# Altium PCB PCB1.PcbDoc
Units mm, origin at the board's own origin, x right, y up, seen from the top; angles counter-clockwise.
Board outline 29 x 39.5 mm, 2 copper layers (Top Layer, Bottom Layer), stack 1.57 mm thick; 32 components, 19 nets, 75 pads, 145 vias.
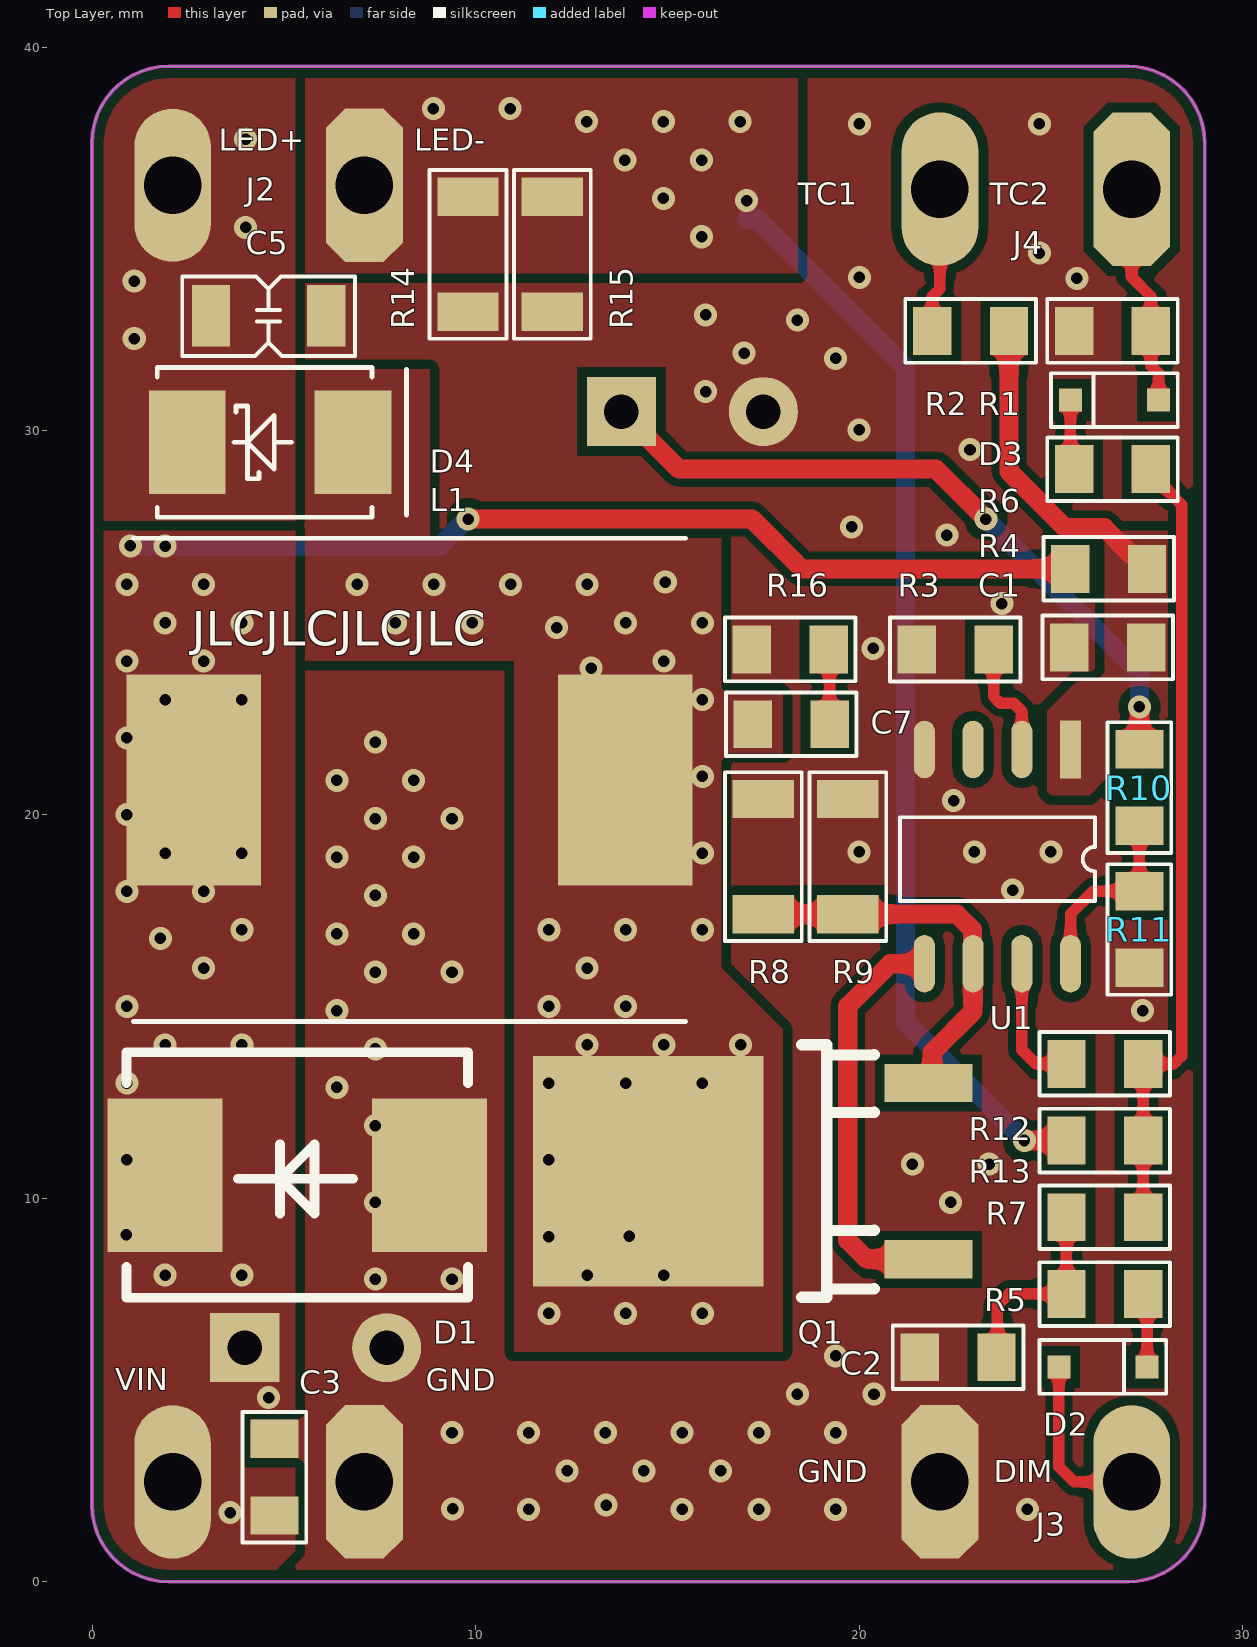
[diagram p0: Top Layer view]
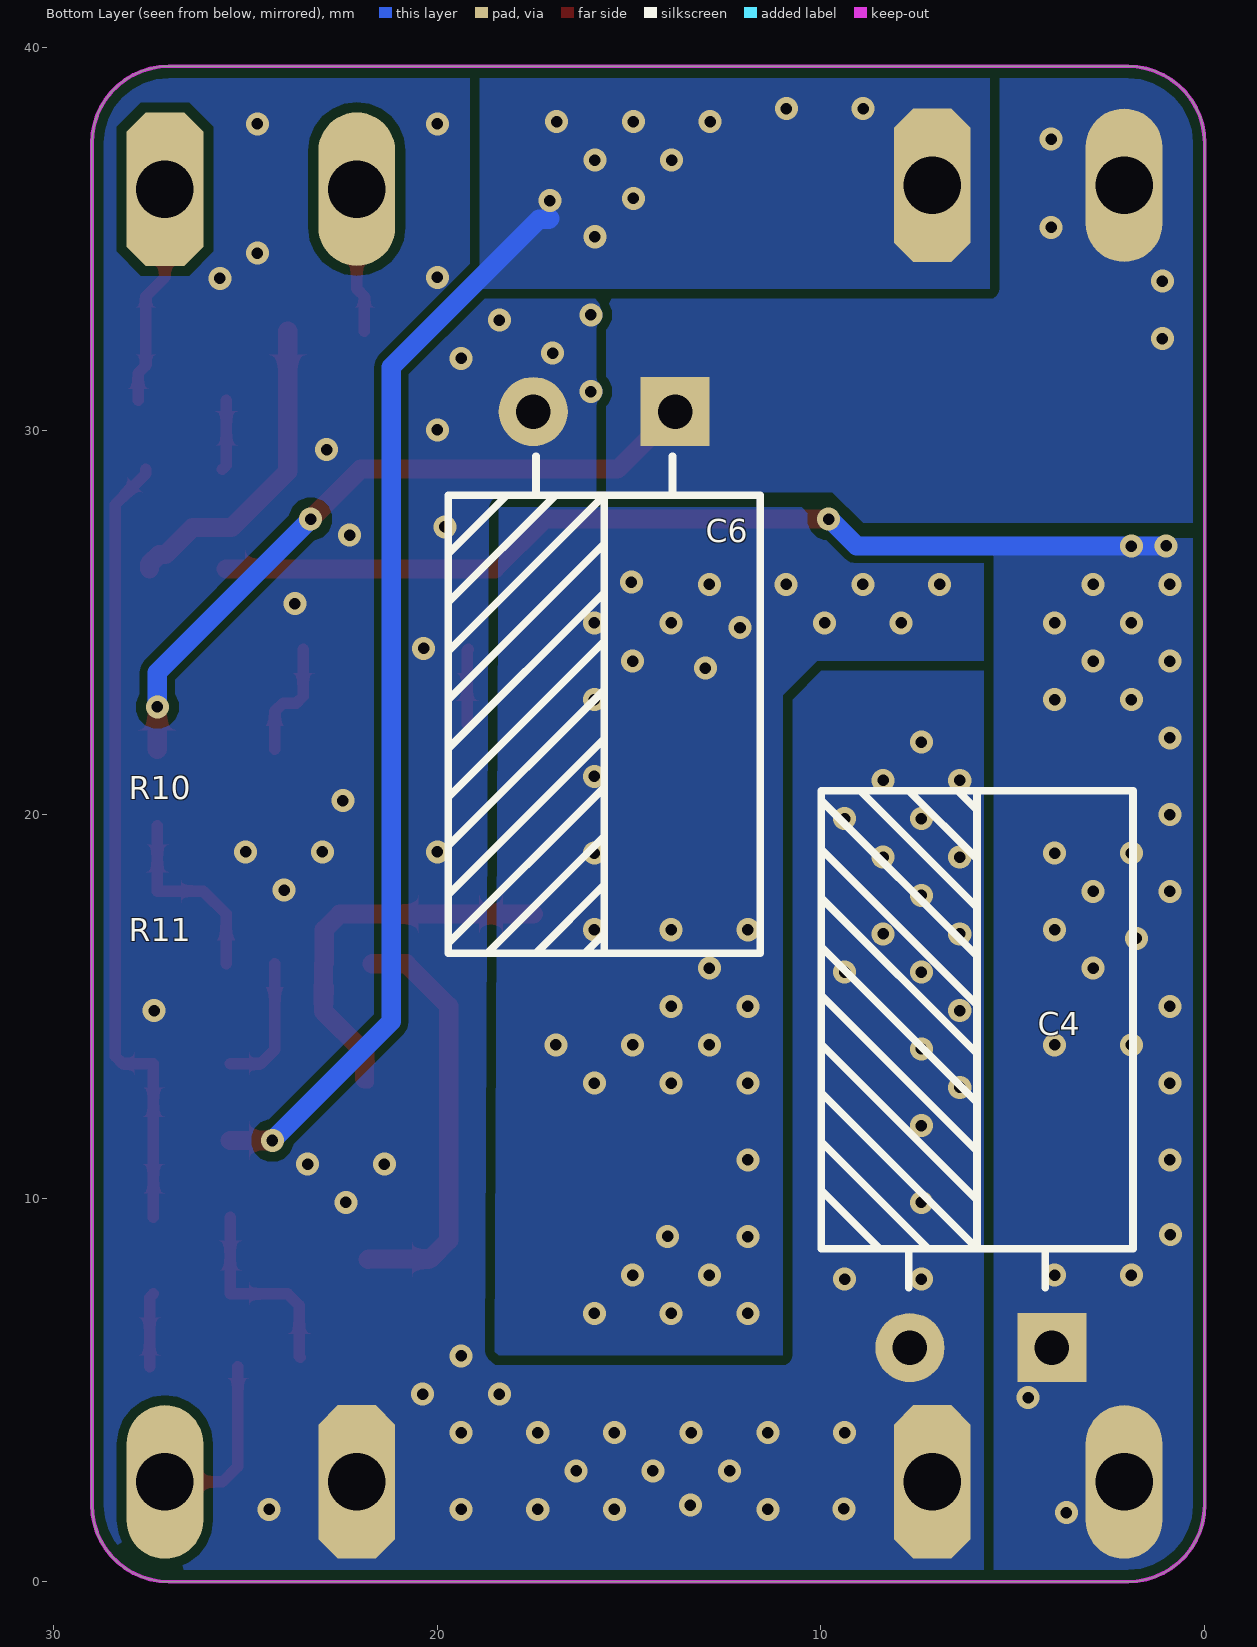
[diagram p1: Bottom Layer view, seen from below]
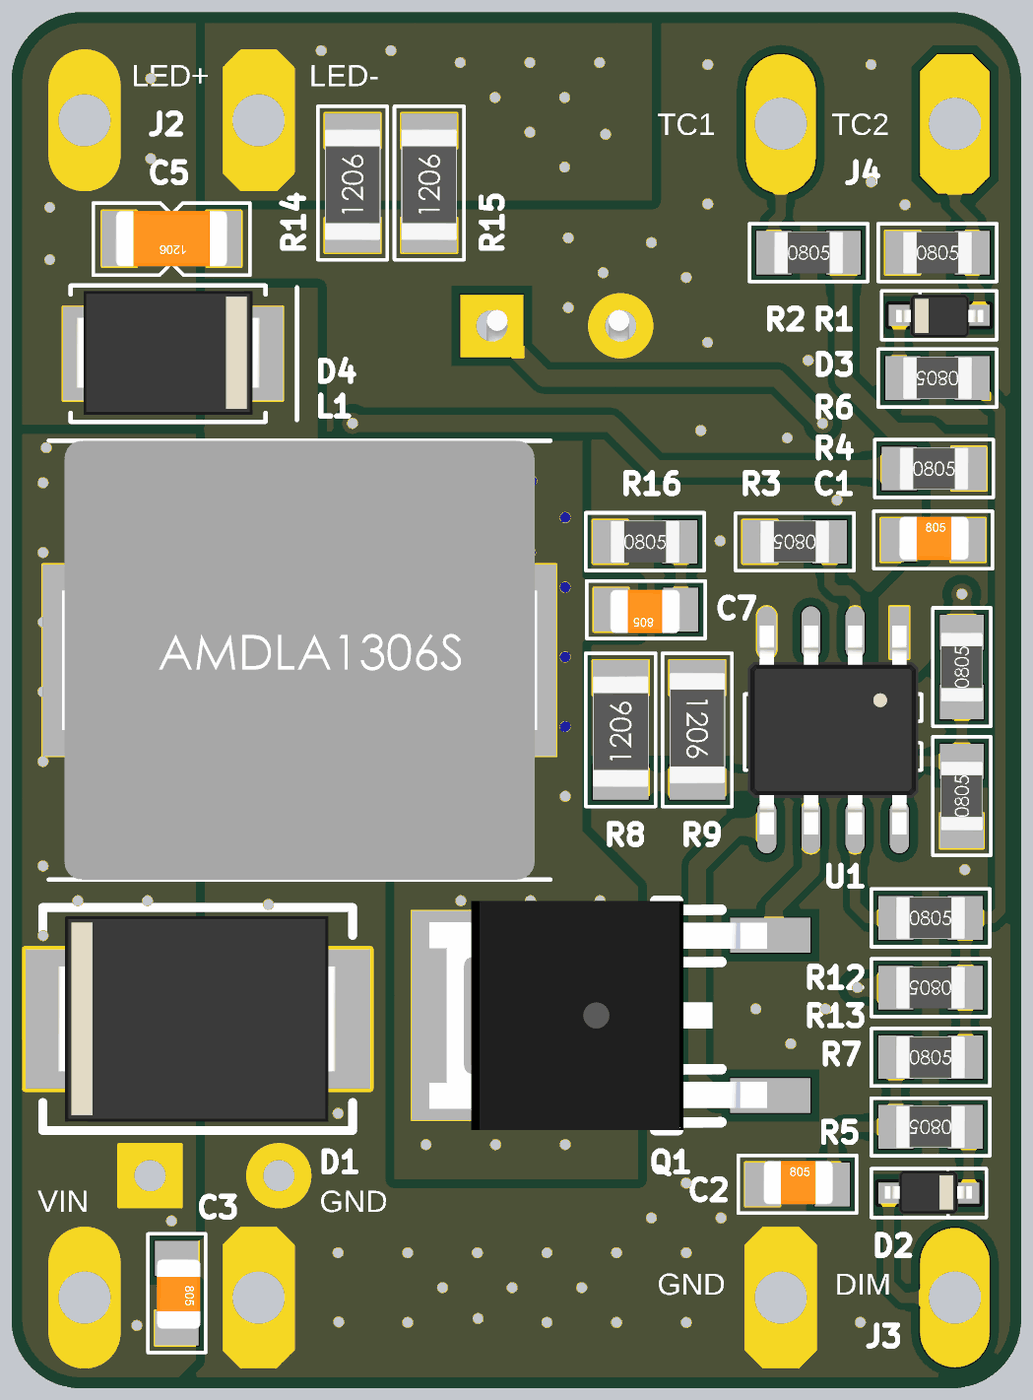
[diagram p2: 3D render of the assembled board from above, using the file's embedded part models]

## Layer stack, top to bottom
Top Solder: solder mask 0.01, Solder Resist, Dk 3.5
Top Layer: signal copper 0.035
Dielectric 1: dielectric 1.5, FR-4, Dk 4.6
Bottom Layer: signal copper 0.035
Bottom Solder: solder mask 0.01, Solder Resist, Dk 3.5

## Board outline
-0.002,2 -0.002,37.5 cw(c2,37.5) 2,39.502 27,39.502 cw(c27,37.5) 29.002,37.5 29.002,2 cw(c27,2) 27,-0.002 2,-0.002 cw(c2,2)

## Design rules (kind name [scope] priority, off if disabled: settings)
Clearance Clearance_1 [OnMid vs OnMid] p1: gap=0.254 ignorepadtopadclearanceinfootprint=FALSE except(0.127: Arc-Arc Arc-Track Arc-Text Track-Track Track-Text SMDPad-SMDPad Text-Text; 0.2: Arc-SMDPad Arc-Fill Arc-Poly Arc-Region Track-SMDPad Track-Fill Track-Poly Track-Region SMDPad-Text Fill-Text Poly-Text Region-Text; 0.33: Arc-THPad Arc-Hole Track-THPad Track-Hole THPad-Text Text-Hole; 0.5: THPad-THPad THPad-Hole) sourcerule=56 cellrowname=All cellrowtype=0 cellcolname=All cellcoltype=0 innerlayers=TRUE
Clearance Clearance_2 [(ExistsOnLayer('Top Layer') Or ExistsOnLayer('Bottom Layer')) vs (ExistsOnLayer('Top Layer') Or ExistsOnLayer('Bottom Layer'))] p2: gap=0.254 ignorepadtopadclearanceinfootprint=FALSE except(0.127: Arc-Arc Arc-Track Arc-Text Track-Track Track-Text SMDPad-SMDPad Text-Text; 0.2: Arc-SMDPad Arc-Fill Arc-Poly Arc-Region Track-SMDPad Track-Fill Track-Poly Track-Region SMDPad-Text Fill-Text Poly-Text Region-Text; 0.33: Arc-THPad Arc-Hole Track-THPad Track-Hole THPad-Text Text-Hole; 0.5: THPad-THPad THPad-Hole) sourcerule=56 cellrowname=All cellrowtype=0 cellcolname=All cellcoltype=0 outerlayers=TRUE
Clearance [All] p3: gap=0.254 ignorepadtopadclearanceinfootprint=FALSE ismatrix=TRUE
HoleSize [All] p1: absolutevalues=TRUE maxlimit=6 minlimit=0.2 maxpercent=80.000 minpercent=20.000
HoleToHoleClearance [All] p1: gap=0.5 allowstackedmicrovias=TRUE
MinimumSolderMaskSliver [All] p1: minsoldermaskwidth=0.1
PolygonConnect [All] p1: connectstyle=Direct reliefconductorwidth=0.254 reliefentries=4 polygonreliefangle="90 Angle" airgapwidth=0.254
RoutingVias RoutingViaStyle_1 [InNet('VIN')] p1: holewidth=0.3 width=0.6 viastyle="Through Hole" minholewidth=0.3 minwidth=0.6 maxholewidth=0.3 maxwidth=0.6
RoutingVias RoutingViaStyle_2 [InNet('VCC')] p2: holewidth=0.3 width=0.6 viastyle="Through Hole" minholewidth=0.3 minwidth=0.6 maxholewidth=0.3 maxwidth=0.6
RoutingVias RoutingViaStyle_3 [InNet('TOFF')] p3: holewidth=0.3 width=0.6 viastyle="Through Hole" minholewidth=0.3 minwidth=0.6 maxholewidth=0.3 maxwidth=0.6
RoutingVias RoutingViaStyle_4 [InNet('CS')] p4: holewidth=0.3 width=0.6 viastyle="Through Hole" minholewidth=0.3 minwidth=0.6 maxholewidth=0.3 maxwidth=0.6
RoutingVias RoutingViaStyle_5 [InNet('DIM')] p5: holewidth=0.3 width=0.6 viastyle="Through Hole" minholewidth=0.3 minwidth=0.6 maxholewidth=0.3 maxwidth=0.6
RoutingVias RoutingViaStyle_6 [InNet('GND')] p6: holewidth=0.3 width=0.6 viastyle="Through Hole" minholewidth=0.3 minwidth=0.6 maxholewidth=0.3 maxwidth=0.6
RoutingVias RoutingViaStyle_7 [InNet('FB')] p7: holewidth=0.3 width=0.6 viastyle="Through Hole" minholewidth=0.3 minwidth=0.6 maxholewidth=0.3 maxwidth=0.6
RoutingVias RoutingViaStyle_8 [InNet('GATE')] p8: holewidth=0.3 width=0.6 viastyle="Through Hole" minholewidth=0.3 minwidth=0.6 maxholewidth=0.3 maxwidth=0.6
RoutingVias RoutingViaStyle_9 [InNet('IND_LED')] p9: holewidth=0.3 width=0.6 viastyle="Through Hole" minholewidth=0.3 minwidth=0.6 maxholewidth=0.3 maxwidth=0.6
RoutingVias RoutingViaStyle_10 [InNet('LED-')] p10: holewidth=0.3 width=0.6 viastyle="Through Hole" minholewidth=0.3 minwidth=0.6 maxholewidth=0.3 maxwidth=0.6
RoutingVias RoutingViaStyle_11 [InNet('LED+')] p11: holewidth=0.3 width=0.6 viastyle="Through Hole" minholewidth=0.3 minwidth=0.6 maxholewidth=0.3 maxwidth=0.6
RoutingVias RoutingViaStyle_12 [InNet('NetC2_2')] p12: holewidth=0.3 width=0.6 viastyle="Through Hole" minholewidth=0.3 minwidth=0.6 maxholewidth=0.3 maxwidth=0.6
RoutingVias RoutingViaStyle_13 [InNet('NetC7_1')] p13: holewidth=0.3 width=0.6 viastyle="Through Hole" minholewidth=0.3 minwidth=0.6 maxholewidth=0.3 maxwidth=0.6
RoutingVias RoutingViaStyle_14 [InNet('NetD2_2')] p14: holewidth=0.3 width=0.6 viastyle="Through Hole" minholewidth=0.3 minwidth=0.6 maxholewidth=0.3 maxwidth=0.6
RoutingVias RoutingViaStyle_15 [InNet('NetD3_2')] p15: holewidth=0.3 width=0.6 viastyle="Through Hole" minholewidth=0.3 minwidth=0.6 maxholewidth=0.3 maxwidth=0.6
RoutingVias RoutingViaStyle_16 [InNet('NetR6_1')] p16: holewidth=0.3 width=0.6 viastyle="Through Hole" minholewidth=0.3 minwidth=0.6 maxholewidth=0.3 maxwidth=0.6
RoutingVias RoutingViaStyle_17 [InNet('OVP')] p17: holewidth=0.3 width=0.6 viastyle="Through Hole" minholewidth=0.3 minwidth=0.6 maxholewidth=0.3 maxwidth=0.6
RoutingVias RoutingViaStyle_18 [InNet('TC1')] p18: holewidth=0.3 width=0.6 viastyle="Through Hole" minholewidth=0.3 minwidth=0.6 maxholewidth=0.3 maxwidth=0.6
RoutingVias RoutingViaStyle_19 [InNet('TC2')] p19: holewidth=0.3 width=0.6 viastyle="Through Hole" minholewidth=0.3 minwidth=0.6 maxholewidth=0.3 maxwidth=0.6
RoutingVias RoutingViaStyle_20 [InDifferentialPairClass('All Differential Pairs')] p20: holewidth=0.3 width=0.6 viastyle="Through Hole" minholewidth=0.3 minwidth=0.6 maxholewidth=0.3 maxwidth=0.6
RoutingVias RoutingViaStyle_21 [All] p21: holewidth=0.254 width=0.254 viastyle="Through Hole" minholewidth=0.254 minwidth=0.254 maxholewidth=0.254 maxwidth=0.254
SilkToSilkClearance [All] p1: silktosilkclearance=0.2
SilkToSolderMaskClearance [IsPad] p1: minsilkscreentomaskgap=0.15 clearancetoexposedcopper=TRUE
SolderMaskExpansion [All] p1: expansion=0.038 istentingtop=FALSE
Width [All] p1: maxlimit=0.5 minlimit=0.127 preferedwidth=0.3 minimp=50.000000 maximp=50.000000 favimp=50.000000
25 further rules are at their usual default settings.

## Components (designator, comment, footprint, x,y, rotation, side; value= is the part's Value field where it differs from the comment)
C1 "CAP SMD 0805 10uF 50V" "CAP Ceramic SMD 0805" 26.5,24.3 r0 top value=10uF
C2 "CAP SMD 0805 10uF 50V" "CAP Ceramic SMD 0805" 22.6,5.8 r0 top value=10uF
C3 "CAP SMD 0805 10uF 50V" "CAP Ceramic SMD 0805" 4.7,2.7 r270 top value=10uF
C5 "CAP SMD 1206 1uF 100V" "CAP Ceramic SMD 1206" 4.6,33 r180 top value=1uF
C6 "180uF" "CAP Electrolytic TH D8C3.5H11.5 (H)" 13.8,30.5 r270 bottom
C7 "CAP SMD 0805 1nF" "CAP Ceramic SMD 0805" 18.2,22.4 r180 top value=1nF
D1 "S5BC" SMC 1.9,10.6 r0 top
D2 "DIODE SMD BAT54WB" SOD-323 25.2,5.6 r0 top
D3 "DIODE SMD BAT54WB" SOD-323 27.8,30.8 r180 top
D4 "SS10100L" DO-214AA 6.8,29.7 r180 top
J2 "ScrewTerminal 2P mm" "Connector screw terminal Block TH 1x2 9.5 WJ46-B" 7.1,36.4 r180 top
J3 "ScrewTerminal 2P mm" "Connector screw terminal Block TH 1x2 9.5 WJ46-B" 22.1,2.6 r0 top
J4 "ScrewTerminal 2P mm" "Connector screw terminal Block TH 1x2 9.5 WJ46-B" 27.1,36.3 r180 top
L1 "IND SMD 1365 10uH" "IND SMD 1365" 2.65,20.9 r0 top value=10uH
Q1 "FQD13N06L" TO252_2 16.2,10.7 r180 top
R1 "1K" "RES SMD 0805" 26.6,32.6 r0 top
R2 "10K" "RES SMD 0805" 22.9,32.6 r0 top
R3 "75K" "RES SMD 0805" 22.5,24.3 r180 top
R4 "5.1K" "RES SMD 0805" 26.5,26.4 r0 top
R5 "30K" "RES SMD 0805" 26.4,7.5 r180 top
R6 "1K" "RES SMD 0805" 26.6,29 r180 top
R7 "30K" "RES SMD 0805" 26.4,9.5 r0 top
R8 "16mR" "RES SMD 1206" 17.5,18.9 r90 top value=160mR
R9 "16mR" "RES SMD 1206" 19.7,18.9 r270 top value=160mR
R10 "430K" "RES SMD 0805" 27.3,20.7 r90 top
R11 "10K" "RES SMD 0805" 27.3,17 r90 top
R12 "1K" "RES SMD 0805" 26.4,13.5 r0 top
R13 "1K" "RES SMD 0805" 26.4,11.5 r180 top
R14 "1R2" "RES SMD 1206" 9.8,34.6 r90 top
R15 "1R2" "RES SMD 1206" 12,34.6 r90 top
R16 "2K2" "RES SMD 0805" 18.2,24.3 r0 top
U1 "SN3948" SN3948_SOP8 23.6,18.9 r270 top

## Footprints (in the part's own frame and the unit in brackets; to place one, negate y for a bottom-side part, rotate by r counter-clockwise, add the part's x,y. Pads: shape width x height; smd on the part's side, far side on the other; paste and mask are expansions set on the pad)
"CAP Ceramic SMD 0805" [mm]
  rect 1x1.25 smd: 1(-1.025,0.05) 2(0.975,0.05)
  silkscreen extent -1.73,-0.78 1.68,0.88, body extent -1,-0.52 1,0.73, height 0.78
"CAP Ceramic SMD 1206" [mm]
  rect 1x1.6 smd: 1(-1.5,0) 2(1.5,0)
  silkscreen extent -2.25,-1.02 2.25,1.05, body extent -1.6,-0.8 1.6,0.8, height 1
"CAP Electrolytic TH D8C3.5H11.5 (H)" [mm]
  rect 1.8x1.8 hole 0.9: 1(0,0)
  round 1.8 hole 0.9: 2(0,-3.7)
  silkscreen extent 1.16,-5.91 14.12,2.21, body extent -0.46,-5.9 13.26,2.1, height 8.03
"Connector screw terminal Block TH 1x2 9.5 WJ46-B" [mm]
  oct 2x4 hole 1.5: 1(0,0)
  oval 2x4 hole 1.5: 2(5,0)
DO-214AA [mm]
  rect 2x2.7 smd: 1(0,0) 2(4.32,0)
  silkscreen extent -1.4,-1.95 5.1,1.95, body extent -0.35,-1.8 4.95,1.75, height 2.15
"IND SMD 1365" [mm]
  rect 3.5x5.5 smd: 1(0,0) 2(11.25,0)
  silkscreen extent -1.58,-6.3 12.83,6.3, body extent -1.19,-6.3 12.44,6.3, height 6.2
"RES SMD 0805" [mm]
  rect 1x1.25 smd: 1(-1,0) 2(1,0)
  silkscreen extent -1.7,-0.83 1.7,0.83, body extent -1,-0.6 1,0.6, height 0.48
"RES SMD 1206" [mm]
  rect 1x1.6 smd: 1(-1.5,0) 2(1.5,0)
  silkscreen extent -2.2,-1 2.2,1, body extent -1.65,-0.8 1.55,0.8, height 0.47
SMC [mm]
  rect 3x4 smd mask+0.102: 1(6.9,0) 2(0,0)
  silkscreen extent -1,-3.2 7.9,3.2, body extent -0.58,-2.95 7.42,2.95, height 2.31
SN3948_SOP8 [mm]
  rect 1.5x0.55 smd: 1(-2.792,1.905)
  oval 1.5x0.55 smd: 2(-2.792,0.635) 3(-2.792,-0.635) 4(-2.792,-1.905) 5(2.793,-1.905) 6(2.793,-0.635) 7(2.793,0.635) 8(2.793,1.905)
  silkscreen extent -1.03,-2.54 1.15,2.54, body extent -3,-2.45 3,2.45, height 1.85
SOD-323 [mm]
  rect 0.6x0.6 smd mask+0.102: 1(0,0) 2(2.3,0)
  silkscreen extent -0.5,-0.7 2.8,0.7, body extent -0.11,-0.61 2.39,0.64, height 1.1
TO252_2 [mm]
  rect 2.3x1 smd: 1(-5.6,2.3) 3(-5.6,-2.3)
  rect 6x6 smd: 2(1.7,0)
  silkscreen extent -4.19,-3.29 -2.29,3.29, body extent -5.5,-3.29 4.2,3.29, height 2.3

## Part data
C1 C2 C3: "50V 10uF X5R ±10% 0805 Multilayer Ceramic Capacitors MLCC - SMD/SMT ROHS", Manufacturer="Murata Electronics", Manufacturer Part Number=GRM21BR61H106KE43L, Supplier Part Number=C440198, Supplier=LCSC
C5: "100V 1uF X7R ±10% 1206 Multilayer Ceramic Capacitors MLCC - SMD/SMT ROHS", Manufacturer=YAGEO, Manufacturer Part Number=CC1206KKX7R0BB105, Supplier Part Number=C70463, Supplier=LCSC
C6: library part "CAP POL 180uF 50V", Manufacturer="SamYoung Electronics", Manufacturer Part Number="NXA50V180M8*20 LO", Supplier Part Number=C2835640, Supplier=LCSC
C7: "100V 1nF NP0 ±5% 0805 Multilayer Ceramic Capacitors MLCC - SMD/SMT ROHS", Manufacturer=YAGEO, Manufacturer Part Number=CC0805JRNPO0BN102, Supplier Part Number=C326940, Supplier=LCSC
D1: "5A 100V 1.15V@5A SMC(DO-214AB) Diodes - General Purpose ROHS", Manufacturer="Diodes Incorporated", Manufacturer Part Number=S5BC-13-F, Supplier Part Number=C155211, Supplier=LCSC
D2 D3: "30V 100mA 240mV@100mA SOD-323W Schottky Diodes ROHS", Manufacturer="Shandong Jingdao Microelectronics", Manufacturer Part Number=BAT54WB, Supplier Part Number=C2972951, Supplier=LCSC
D4: "100V 10A 700mV SMB Schottky Diodes ROHS", Manufacturer=GOODWORK, Supplier Part Number=C21713964, Manufacturer Part Number=SS10100L, Supplier=LCSC
J2 J3 J4: "Copper Alloy 1x2P Tin 5mm 2.5 1 2 10A -40℃~+105℃ 300V Green 14~26 Direct Insert Plugin,P=5mm Screw Terminal Blocks ROHS", Manufacturer=MAX, Manufacturer Part Number=MX126-5.0-02P-GN01-Cu-S-A, Supplier Part Number=C5188434, ComponentLink1Description=https://datasheet.ciiva.com/824/6912141100xx-824001.pdf?src-supplier=Digi-Key, ComponentLink1URL=https://datasheet.ciiva.com/824/6912141100xx-824001.pdf?src-supplier=Digi-Key, ComponentLink2Description=https://datasheet.ciiva.com/48693/001088618-da-01-en-wr-tbl-terminal-block2141-691214110002-48693195.pdf?src-supplier=Conrad, ComponentLink2URL=https://datasheet.ciiva.com/48693/001088618-da-01-en-wr-tbl-terminal-block2141-691214110002-48693195.pdf?src-supplier=Conrad, Supplier=LCSC
L1: "10A 10uH ±20% 13A 19.2mΩ SMD,12.6x13.5mm Inductors (SMD) ROHS", Manufacturer=KOHERelec, Manufacturer Part Number=MDA1365-100M, Supllier Part Number=C2847583, Supplier=LCSC
Q1: "60V 11A 115mΩ@10V,5.5A 2.5V@250uA 1 N-Channel TO-252AA MOSFETs ROHS", Manufacturer=onsemi, Manufacturer Part Number=FQD13N06LTM, Supplier Part Number=C236914, Supplier=LCSC
R1 R6 R12 R13: library part "RES SMD 0805 1K", Manufacturer=YAGEO, Manufacturer Part Number=RC0805FR-071KL, Supplier Part Number=C95781, Supplier=LCSC
R2 R11: library part "RES SMD 0805 10K", "125mW Thick Film Resistors 150V ±100ppm/℃ ±1% 10kΩ 0805 Chip Resistor - Surface Mount ROHS", Manufacturer=YAGEO, Manufacturer Part Number=RC0805FR-0710KL, Supplier Part Number=C84376, Supplier=LCSC
R3: library part "RES SMD 0805 75K", "125mW Thick Film Resistors 150V ±100ppm/℃ ±1% 75kΩ 0805 Chip Resistor - Surface Mount ROHS", Manufacturer=YAGEO, Manufacturer Part Number=RC0805FR-0775KL, Supplier Part Number=C137491, Supplier=LCSC
R4: library part "RES SMD 0805 5.1K", "400mW Thick Film Resistors 150V ±200ppm/℃ ±5% 5.1kΩ 0805 Chip Resistor - Surface Mount ROHS", Manufacturer="ROHM Semicon", Manufacturer Part Number=ESR10EZPJ512, Supplier Part Number=C2085709, Supplier=LCSC
R5 R7: library part "RES SMD 0805 30K", Manufacturer=FOJAN, Manufacturer Part Number=FRC0805J303TS, Supplier Part Number=C2930272, Supplier=LCSC
R8 R9: library part "RES SMD 1206 160mR", "500mW Thick Film Resistors 200V ±1% 160mΩ 1206 Chip Resistor - Surface Mount ROHS", Manufacturer="UNI-ROYAL(Uniroyal Elec)", Manufacturer Part Number=HP06W2F160LT5E, Supplier Part Number=C414953, Supplier=LCSC
R10: library part "RES SMD 0805 430K", "125mW Thick Film Resistors 150V ±100ppm/℃ ±5% 430kΩ 0805 Chip Resistor - Surface Mount ROHS", Manufacturer=YAGEO, Manufacturer Part Number=RC0805JR-07430KL, Supplier Part Number=C137431, Supplier=LCSC
R14 R15: library part "RES SMD 1206 1R20", "500mW Thick Film Resistors ±200ppm/℃ ±1% 1.2Ω 1206 Chip Resistor - Surface Mount ROHS", Manufacturer=YAGEO, Manufacturer Part Number=RC1206FR-7W1R2L, Supplier Part Number=C5355180, Supplier=LCSC
R16: library part "RES SMD 0805 2K2", Manufacturer=YAGEO, Manufacturer Part Number=RC0805FR-072K2L, Supplier Part Number=C114561, Supplier=LCSC
U1: "SOP-8 DC-DC Converters ROHS", Manufacturer=ISSI, Supplier Part Number=C3041112, Manufacturer Part Number=SN3948, Supplier=LCSC

## Free pads (board coordinates)
  rect 1.8x1.8 hole 0.9: 1(3.981,6.1)
  oct 2x4 hole 1.5: 1(7.1,2.6)
  oval 2x4 hole 1.5: 2(2.1,2.6)
  round 1.8 hole 0.9: 2(7.681,6.1)

## Via types
v1: diameter 0.6, hole 0.3, Top Layer to Bottom Layer, tented both sides, 145 vias

## Nets (pads, with @x,y where several pads share a name; then routed paths per layer and width w, separated by ;. In a path a pad name is that pad's centre, name@x,y a point inside that pad or via, vN(x,y) a via of type N, cw(c..) or ccw(c..) an arc to the next point about the centre after c; other vN are vias at no path point)
CS: Q1.3 R8.1 R9.2 U1.6 | length 10.1
  Top Layer w0.3: Q1.3 Q1.3@21.9,13.1 ; U1.6@22.95,16.123 U1.6
  Top Layer w0.5: R8.1 R9.2 22.542,17.4 22.95,16.993 U1.6@22.95,16.123 ; Q1.3@21.9,13.1 21.9,13.8 22.965,14.865 U1.6
DIM: D2.1 J3.2 | length 4.7
  Top Layer w0.3: D2.1 25.2,3 25.6,2.6 J3.2
FB: R12.1 U1.7 | length 3.6
  Top Layer w0.3: U1.7 24.235,13.865 24.6,13.5 R12.1
GATE: Q1.1 U1.5 | length 10.9
  Top Layer w0.5: U1.5 20.807,16.107 19.7,15 19.7,8.9 20.193,8.407 21.793,8.407 Q1.1
GND: C1.1 C2.1 C3.1 C5.1 C6.2 D1.1 J3.1 pad.1@7.1,2.6 pad.2@7.681,6.1 R1.1 R3.2 R8.2 R9.1 R11.1 R14.1 R15.1 R16.1 U1.4
  other v1: 11.382,1.887 15.382,1.887 17.382,1.887 19.382,1.887 24.382,1.887 9.4,1.9 13.402,1.998 12.382,2.887 14.382,2.887 16.382,2.887 9.382,3.887 11.382,3.887 13.382,3.887 15.382,3.887 17.382,3.887 19.382,3.887 18.382,4.887 20.382,4.887 19.382,5.887 7.382,7.887 9.382,7.887 7.382,9.887 22.382,9.887 21.382,10.887 23.382,10.887 7.382,11.887 6.382,12.887 7.382,13.887 6.382,14.887 27.382,14.887 7.382,15.887 9.382,15.887 6.382,16.887 8.382,16.887 7.382,17.887 23.996,18.024 6.382,18.887 8.382,18.887 19.996,19.024 22.996,19.024 24.996,19.024 7.382,19.887 9.382,19.887 22.461,20.361 6.382,20.887 8.382,20.887 7.382,21.887 20.358,24.325 23.713,25.496 22.285,27.281 19.801,27.495 22.885,29.508 19.996,30.024 15.996,31.024 19.382,31.887 16.996,32.024 18.382,32.887 15.996,33.024 25.67,33.975 20,34 24.692,34.628 20,38 24.692,38
IND_LED: C7.2 D4.1 L1.2 Q1.2
  other v1: 11.908,6.993 13.908,6.993 15.908,6.993 12.908,7.993 14.908,7.993 11.908,8.993 14,9 11.908,10.993 11.908,12.993 13.908,12.993 15.908,12.993 12.908,13.993 14.908,13.993 16.908,13.993 11.908,14.993 13.908,14.993 12.908,15.993 11.908,16.993 13.908,16.993 15.908,16.993 15.908,18.993 15.908,20.993 15.908,22.993 13.011,23.814 14.908,23.993 12.11,24.869 7.908,24.993 9.908,24.993 13.908,24.993 15.908,24.993 6.908,25.993 8.908,25.993 10.908,25.993 12.908,25.993 14.941,26.052
LED+: C5.2 C6.1 D4.2 J2.2 R10.2 | length 18.7
  Top Layer w0.5: C6.1 15.3,29 22,29 v1(23.3,27.7) ; R10.2 v1(27.3,22.8)
  Bottom Layer w0.5: J2.2 J2.2@2.337,36.163 ; v1(23.3,27.7) 27.3,23.7 v1(27.3,22.8)
  other v1: 1.1,32.4 1.1,33.9 4,35.3 4,37.6
LED-: J2.1 R13.2 R14.2 R15.2 | length 28.3
  Top Layer w0.5: v1(24.3,11.5) R13.2
  Bottom Layer w0.5: 17.069,35.531 17.088,35.512 17.347,35.512 21.2,31.66 21.2,14.6 v1(24.3,11.5)
  other v1: 15.891,35.057 17.064,36 14.891,36.057 13.891,37.057 15.891,37.057 12.891,38.057 14.891,38.057 16.891,38.057 8.9,38.4 10.9,38.4
NetC2_2: C2.2 R5.2 R7.1 | length 5.3
  Top Layer w0.3: C2.2 23.6,5.875 23.6,7.2 23.9,7.5 R5.2 R7.1
NetC7_1: C7.1 R16.2 | length 2
  Top Layer w0.3: R16.2 19.225,24.275 C7.1
NetD2_2: D2.2 R5.1 | length 1.9
  Top Layer w0.3: R5.1 27.5,7.4 D2.2
NetD3_2: D3.2 R6.2 | length 1.8
  Top Layer w0.3: D3.2 25.5,29.1 R6.2
NetR6_1: R6.1 R7.2 R12.2 R13.1 | length 20.7
  Top Layer w0.3: R7.2 R13.1 R12.2 28.2,13.5 28.4,13.7 28.4,28.075 27.6,28.875 R6.1
OVP: R10.1 R11.2 U1.8 | length 5
  Top Layer w0.3: U1.8 25.505,17.405 26.1,18 R11.2 R10.1
TC1: J4.2 R2.1 | length 3.8
  Top Layer w0.3: R2.1 21.9,33.5 22.1,33.7 J4.2
TC2: D3.1 J4.1 R1.2 | length 5.8
  Top Layer w0.3: J4.1 27.1,34 27.6,33.5 R1.2 27.6,31.7 27.8,31.5 D3.1
TOFF: R3.1 U1.2 | length 3.1
  Top Layer w0.3: R3.1 23.5,23.076 23.676,22.9 24.022,22.9 24.235,22.687 U1.2
VCC: C1.2 R2.2 R4.2 U1.1 | length 8.4
  Top Layer w0.5: R2.2 23.9,28.939 25.364,27.475 26.382,27.475 27.082,26.775 27.25,26.775 27.5,26.525 R4.2
VIN: C3.2 D1.2 L1.1 pad.1@3.981,6.1 pad.2@2.1,2.6 R4.1 | length 25.3
  Top Layer w0.5: v1(9.8,27.7) 17.2,27.7 18.5,26.4 R4.1
  Bottom Layer w0.5: v1(1,27) 9.073,27 9.773,27.7 v1(9.8,27.7)
  other v1: 3.6,1.8 4.6,4.8 1.908,7.993 3.908,7.993 0.892,9.044 0.908,10.993 0.908,12.993 1.908,13.993 3.908,13.993 0.908,14.993 2.908,15.993 1.778,16.769 3.908,16.993 0.908,17.993 2.908,17.993 1.908,18.993 3.908,18.993 0.908,19.993 0.908,21.993 1.908,22.993 3.908,22.993 0.908,23.993 2.908,23.993 1.908,24.993 3.908,24.993 0.908,25.993 2.908,25.993 1.908,26.993
pads on no net: U1.3

## Polygon pours and split planes (outlines as drawn)
GND on Top Layer "GND_L01_P008" (solid, pour order 8): -0.2,39.6 27.8,39.6 29.3,38.1 29.3,-0.1 1.2,-0.1 -0.5,1.6
VCC on Top Layer "VCC_L01_P004" (solid, pour order 4): 25,20.5 24.9,20.6 24.9,22.7 25.7,23.5 26.2,23.5 26.4,23.7 26.4,27.1 26.7,27.4 28.4,27.4 28.4,22.9 26,20.5
IND_LED on Top Layer "IND_LED_L01_P003" (solid, pour order 3): 5.3,31.6 8.8,31.6 8.8,27.2 16.4,27.2 16.4,23.3 16.5,23.2 17.9,23.2 18,23.1 18,21.6 16.6,21.6 16.4,21.4 16.4,16 18,14.4 18,6 11,6 11,24 5.3,24
LED- on Top Layer "LED-_L01_P002" (solid, pour order 2): 5.3,39.5 18.4,39.5 18.4,34.1 5.3,34.1
LED+ on Top Layer "LED+_L01_P001" (solid, pour order 1): 5.3,27.4 5.3,39.5 0.8,39.5 0,38.7 0,27.4
VIN on Top Layer "VIN_L01_P000" (solid, pour order 0): 4.5,0 5.3,0.8 5.3,27.4 0,27.4 0,0.9 0.9,0
LED+ on Bottom Layer "LED+_L02_P006" (solid, pour order 6): 5.4,39.5 -0.002,39.5 -0.002,27.6 8.9,27.6 9.7,28.4 15.6,28.4 15.6,33.5 5.6,33.5 5.6,39.3
LED- on Bottom Layer "LED-_L02_P005" (solid, pour order 5): 5.6,39.501 5.6,33.7 18.9,33.7 18.9,39.401
GND on Bottom Layer "GND_L02_P010" (solid, pour order 10): -0.002,39.502 29.002,39.502 29.002,0.402 28.598,-0.002 -0.002,-0.002
IND_LED on Bottom Layer "IND_LED_L02_P009" (solid, pour order 9): 18.5,6 18.4,5.9 11,5.9 11,23.1 10.1,24 5.6,24 5.5,24.1 5.5,26.7 9.2,26.7 10.5,28 18.4,28
VIN on Bottom Layer "VIN_L02_P007" (solid, pour order 7): 5.5,0 -0.1,0 -0.1,27.2 5.5,27.2

## Keep-outs
Keep-Out Layer:
  lines w0.1: -0.002,2 ccw(c2,2) 2,-0.002 27,-0.002 ccw(c27,2) 29.002,2 29.002,37.5 ccw(c27,37.5) 27,39.502 18.002,39.502 2,39.502 ccw(c2,37.5) -0.002,37.5 -0.002,2

## Silkscreen, mask and mechanical layers (free items; w line width, h text height)
Top Overlay:
  text "LED+" at 3.3,37.1 h1
  text "LED-" at 8.4,37.1 h1
  text "TC1" at 18.4,35.7 h1
  text "TC2" at 23.4,35.7 h1
  text "JLCJLCJLCJLC" at 2.6,24.4 h0.9
  text "VIN" at 0.6,4.8 h1
  text "GND" at 8.7,4.778 h1
  text "GND" at 18.4,2.4 h1
  text "DIM" at 23.5,2.4 h1
Bottom Overlay:
  lines w0.2: 4.153,7.662 4.153,8.678 ; 5.931,9.948 9.995,14.012 ; 5.931,11.218 9.995,15.282 ; 5.931,12.488 9.995,16.552 ; 5.931,13.758 9.995,17.822 ; 5.931,15.028 9.995,19.092 ; 5.931,16.298 9.995,20.362 ; 5.931,17.568 8.979,20.616 ; 5.931,18.838 7.709,20.616 ; 5.931,20.108 6.439,20.616 ; 5.931,20.616 5.931,8.678 9.995,12.742 ; 7.201,8.678 9.995,11.472 ; 7.709,7.662 7.709,8.678 ; 8.471,8.678 9.995,10.202 ; 1.867,8.678 9.995,8.678 9.995,20.616 1.867,20.616 1.867,8.678
  text "C4" at 4.35,14.25 h0.6
Bottom Designator:
  text ".Designator" at 4.772,7.556 h1 r90
Top 3D Body:
  text "2" at 2.5,4 h2 r180
  text "1" at 7.3,3.2 h2 r180

## Text inside footprints (layer, text, board x,y; h text height)
J2: Top 3D Body "2" at 2.5,37.8 h2 r180; Top 3D Body "1" at 7.3,37 h2 r180
J3: Top 3D Body "2" at 26.7,1.2 h2; Top 3D Body "1" at 21.9,2 h2
J4: Top 3D Body "2" at 22.5,37.7 h2 r180; Top 3D Body "1" at 27.3,36.9 h2 r180